# Altium PCB MainPCBV6.PcbDoc (part 4 of 5)
Units mm, origin at the board's own origin, x right, y up, seen from the top; angles counter-clockwise.
Board outline 176 x 144.01 mm, 2 copper layers (Top Layer, Bottom Layer); 232 components, 243 nets, 937 pads, 277 vias.
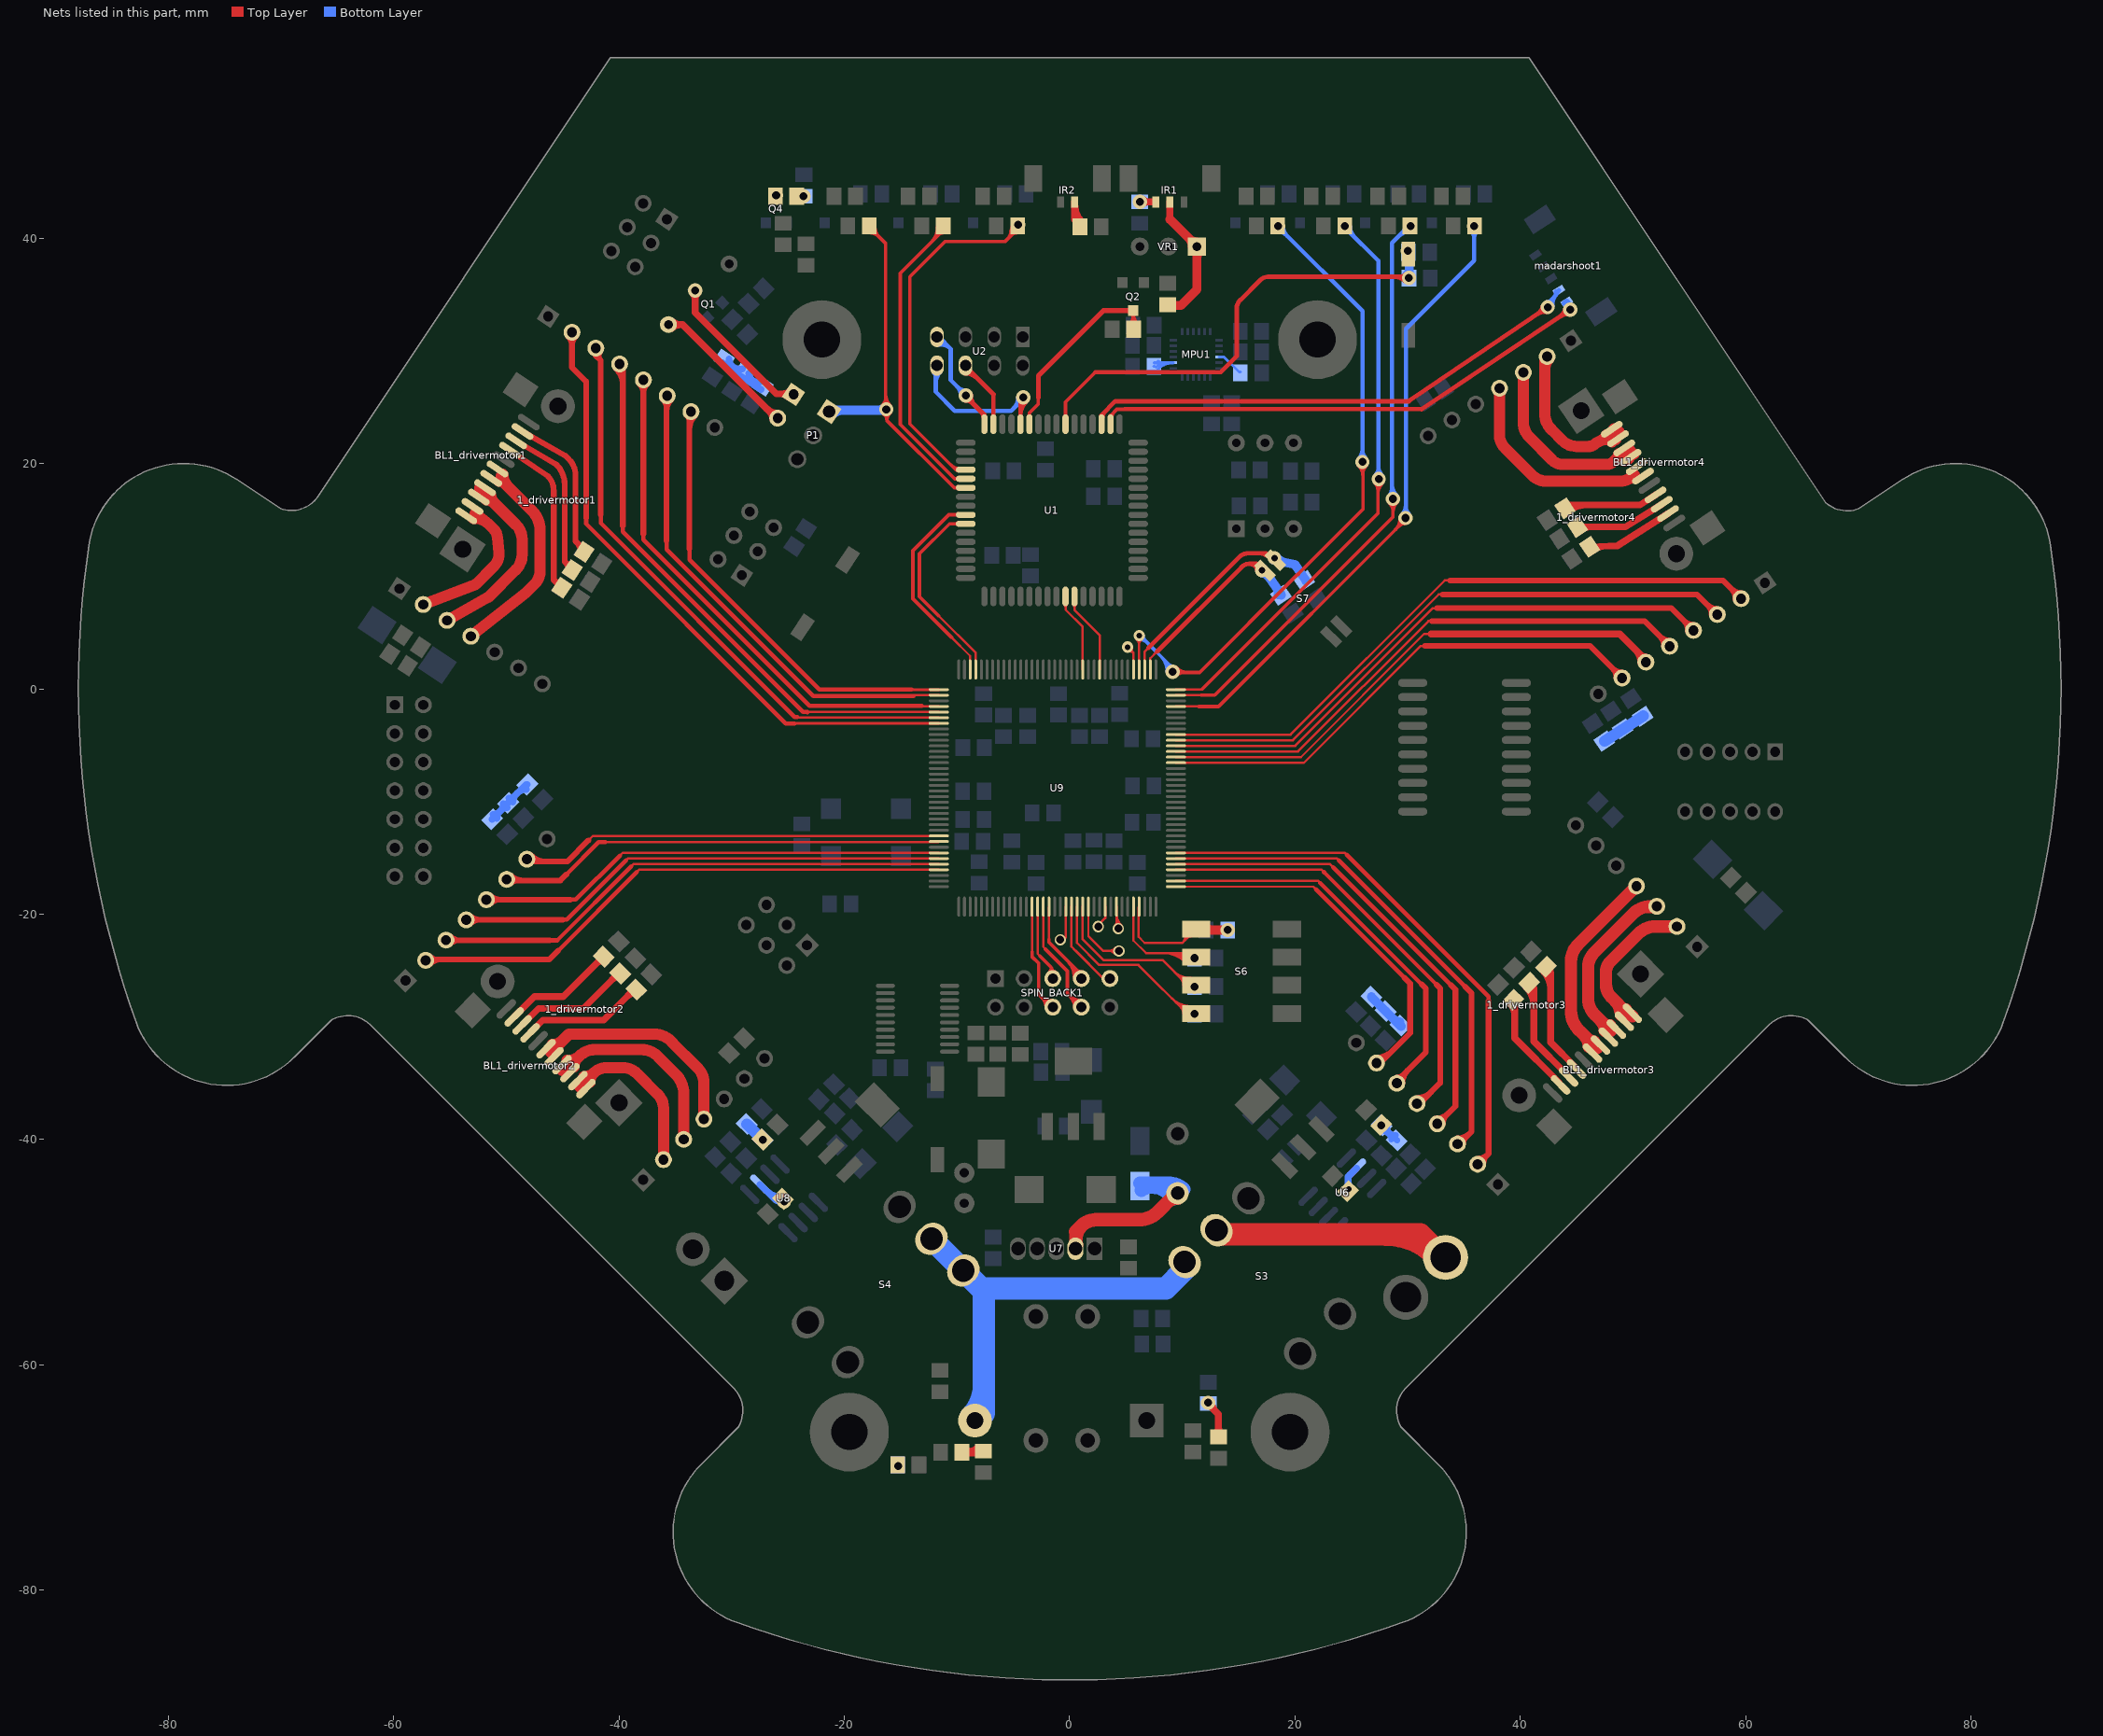
[diagram p4: the nets of this part, all layers, seen from the top]

## Via types
v1: diameter 1.27, hole 0.711, Top Layer to Bottom Layer, 228 vias
v2: diameter 1, hole 0.5, Top Layer to Bottom Layer, 16 vias
v3: diameter 2, hole 1, Top Layer to Bottom Layer, 11 vias
v4: diameter 0.8, hole 0.5, Top Layer to Bottom Layer, 5 vias
v5: diameter 1, hole 0.7, Top Layer to Bottom Layer, 5 vias
v6: diameter 1.2, hole 0.6, Top Layer to Bottom Layer, 3 vias
v7: diameter 1.778, hole 0.965, Top Layer to Bottom Layer, 2 vias
v8: diameter 1, hole 0.6, Top Layer to Bottom Layer, 2 vias
v9: diameter 0.9, hole 0.5, Top Layer to Bottom Layer, 1 vias
v10: diameter 0.7, hole 0.45, Top Layer to Bottom Layer, 1 vias
v11: diameter 1.2, hole 0.9, Top Layer to Bottom Layer, 1 vias
v12: diameter 0.8, hole 0.4, Top Layer to Bottom Layer, 1 vias
v13: diameter 1.1, hole 0.711, Top Layer to Bottom Layer, 1 vias

## Nets (pads, with @x,y where several pads share a name; then routed paths per layer and width w, separated by ;. In a path a pad name is that pad's centre, name@x,y a point inside that pad or via, vN(x,y) a via of type N, cw(c..) or ccw(c..) an arc to the next point about the centre after c; other vN are vias at no path point) (continued)
IO122: SPIN_BACK1.6 U9.122 | length 13.1
  Top Layer w0.203: U9.122@-3.342,-19.329 -3.342,-23.302 -3.327,-23.317
  Top Layer w0.305: -3.347,-23.339 -3.347,-23.78 -2.743,-24.384 -2.743,-27.127 -1.905,-27.965 SPIN_BACK1.6@-1.016,-27.965 ; -2.703,-27.167 ccw(c-1.506,-25.97) SPIN_BACK1.6@-1.506,-27.663 ; -2.453,-27.417 cw(c-3.296,-28.261) SPIN_BACK1.6@-2.104,-28.261 ; -2.183,-27.688 ccw(c-1.506,-27.011) SPIN_BACK1.6@-1.506,-27.968
IO123: SPIN_BACK1.5 U9.123 | length 8.1
  Top Layer w0.203: U9.123@-2.842,-19.339 -2.842,-23.523 -2.642,-23.724
  Top Layer w0.305: -2.642,-23.724 -1.626,-24.74 ; SPIN_BACK1.5@-1.874,-25.25 ccw(c-2.274,-24.74) -1.626,-24.74 ; SPIN_BACK1.5@-1.626,-25.781 -1.626,-24.74 ; SPIN_BACK1.5@-1.325,-25.151 cw(c-1.193,-24.74) -1.626,-24.74
IO124: SPIN_BACK1.8 U9.124 | length 13.8
  Top Layer w0.203: U9.124@-2.342,-19.355 -2.342,-22.905 -2.159,-23.089
  Top Layer w0.305: -2.159,-23.114 -0.203,-25.07 -0.203,-27.076 0.94,-28.219 SPIN_BACK1.8@1.6,-28.219 ; -0.076,-27.203 ccw(c1.034,-26.093) SPIN_BACK1.8@1.034,-27.663 ; 0.051,-27.331 cw(c-0.879,-28.261) SPIN_BACK1.8@0.436,-28.261 ; 0.444,-27.724 ccw(c1.034,-27.134) SPIN_BACK1.8@1.034,-27.968
IO125: SPIN_BACK1.7 U9.125 | length 11.4
  Top Layer w0.203: -1.842,-22.225 U9.125@-1.842,-19.406
  Top Layer w0.305: -1.842,-22.225 -1.842,-22.491 1.041,-25.375 1.041,-25.451 1.346,-25.756 SPIN_BACK1.7@1.6,-25.756 ; -0.236,-24.097 cw(c-1.86,-25.721) SPIN_BACK1.7@0.436,-25.721 ; 0.284,-24.617 cw(c-0.819,-25.721) SPIN_BACK1.7@0.741,-25.721 ; 0.617,-24.951 ccw(c1.034,-24.534) SPIN_BACK1.7@1.034,-25.123
IO128: U9.128 | length 3.5
  Top Layer w0.203: v5@-0.711,-22.428 -0.342,-22.059 U9.128@-0.342,-19.339 ; v5@-0.44,-22.276 cw(c-0.153,-22.276) -0.356,-22.073
  other v5: -0.838,-22.276
IO129: SPIN_BACK1.9 U9.129 | length 8.1
  Top Layer w0.203: U9.129@0.158,-19.339 0.158,-22.891 0.508,-23.241
  Top Layer w0.254: 0.508,-23.241 2.988,-25.721 SPIN_BACK1.9@3.574,-25.721
IO132: U9.132 | length 7.4
  Top Layer w0.203: U9.132@1.658,-19.339 1.658,-21.952 2.972,-23.266 v5(4.369,-23.266) ; v5@4.087,-23.548 ccw(c3.407,-24.228) 3.407,-23.266 ccw(c3.407,-22.305) v5@4.087,-22.985
IO135: U9.135 | length 2.1
  Top Layer w0.203: v5@2.406,-21.1 3.158,-20.348 U9.135@3.158,-19.339
  other v5: 2.54,-21.107
IO137: U9.137 | length 4.5
  Top Layer w0.203: v5@4.036,-21.003 ccw(c3.743,-20.71) 4.158,-20.71 ; v5@4.158,-21.514 U9.137@4.158,-19.339 ; 4.158,-20.427 ccw(c5.176,-20.427) v5@4.456,-21.147 ; U9.137@4.158,-19.937 ccw(c5.667,-19.937) v5@4.6,-21.003
  other v5: 4.318,-21.285
IR1: Q2.1 R30.2 U1.27 | length 21.7
  Top Layer w0.305: U1.27@-3.661,24.186 ccw(c-3.871,24.396) -3.575,24.396 ccw(c-3.279,24.396) U1.27@-3.488,24.186 ; U1.27@-3.575,23.5 -3.575,24.493 -2.794,25.274 -2.794,25.857 ; R30.2@5.323,32.38 ccw(c4.473,33.229) 5.674,33.229 ccw(c6.876,33.229) R30.2@6.026,32.38 ; Q2.1@5.428,33.338 cw(c4.834,32.744) 5.674,32.744 ; R30.2@5.674,31.826 5.674,33.457 Q2.1@5.791,33.573 ; 5.674,32.916 cw(c6.271,32.916) Q2.1@5.849,33.338
  Top Layer w0.432: -2.769,25.883 -2.769,27.813 2.992,33.573 Q2.1@5.791,33.573 ; Q2.1@5.473,33.408 ccw(c5.074,33.008) 5.074,33.573 ccw(c5.074,34.139) Q2.1@5.473,33.739
IRQ: U1.28 U2.8 | length 19.5
  Top Layer w0.381: U1.28@-4.375,23.5 -4.375,25.597 v1@-4.039,25.933 ; U1.28@-4.375,24.182 cw(c-2.414,24.182) v1@-3.8,25.568 ; -4.375,25.102 cw(c-3.334,25.102) v1@-4.07,25.838
  Bottom Layer w0.305: U2.8@-11.887,28.651 U2.8@-11.786,28.753
  Bottom Layer w0.381: U2.8@-12.075,28.112 cw(c-12.529,27.659) -11.887,27.659 ; -11.887,27.168 cw(c-10.552,27.168) U2.8@-11.496,28.112 ; U2.8@-11.887,28.651 -11.887,26.365 -10.211,24.689 -5.207,24.689 v1@-4.115,25.781 ; -4.945,24.95 ccw(c-5.878,25.883) v1@-4.559,25.883 ; -4.7,25.196 cw(c-4.115,24.61) v1@-4.115,25.438
  other v1: -4.115,25.883
K_TEST: C14.1 R22.1 S2.1 U1.23 | length 45.8
  Top Layer w0.305: U1.23@-0.461,24.186 ccw(c-0.671,24.396) -0.375,24.396 ccw(c-0.079,24.396) U1.23@-0.288,24.186 ; U1.23@-0.375,23.5 -0.375,25.457 2.286,28.118
  Top Layer w0.4: 2.286,28.118 13.411,28.118 14.828,29.534 14.828,33.782 cw(c15.856,33.782) 15.129,34.509 ; 15.129,34.509 16.904,36.284 cw(c17.609,35.579) 17.609,36.576 30.013,36.576 v1(30.114,36.474) ; 28.819,36.576 cw(c28.819,35.179) v1@29.807,36.167 ; 29.309,36.576 ccw(c29.309,37.279) v1@29.807,36.782
  Bottom Layer w0.635: C14.1@30.114,36.601 C14.1@30.14,36.627
  Bottom Layer w0.8: R22.1@29.857,38.721 cw(c29.173,38.038) R22.1@30.14,38.038 ; R22.1@29.887,38.484 cw(c29.276,37.873) 30.14,37.873 ; C14.1@29.937,36.751 ccw(c29.449,37.239) 30.14,37.239 ; C14.1@30.14,36.627 R22.1@30.14,38.532
  other v1: 30.023,38.887
KICK_CHIP: madarshoot1.1 U1.18 | length 49
  Top Layer w0.3: U1.18@3.625,24.254 4.187,24.816 4.877,24.816 ; U1.18@3.75,24.1 cw(c4.425,24.1) 3.948,24.577
  Top Layer w0.4: U1.18@3.625,23.5 U1.18@3.625,24.254 ; 4.902,24.841 31.241,24.841 ; 31.241,24.805 v1(44.435,33.665) ; v1@44.008,33.749 cw(c42.978,33.951) 43.563,33.079 cw(c44.149,32.207) v1@44.351,33.238
  Bottom Layer w0.6: madarshoot1.1@43.953,34.23 cw(c43.723,33.596) v1@44.334,33.881 ; v1@44.128,33.797 ccw(c43.519,34.06) madarshoot1.1@44.12,34.341 ; v1(44.435,33.665) madarshoot1.1@44.12,34.341 ; v1@44.531,33.986 cw(c44.721,34.621) madarshoot1.1@44.12,34.341
KICK_DIR: madarshoot1.2 U1.19 | length 49.5
  Top Layer w0.4: U1.19@2.825,23.5 2.825,24.303 4.049,25.527 30.115,25.527 ; U1.19@2.9,24.1 cw(c3.572,24.1) 3.097,24.574 ; 30.115,25.556 v1(42.432,33.889) ; v1@42.004,33.971 cw(c40.973,34.17) 41.562,33.301 cw(c42.15,32.431) v1@42.349,33.462
  Bottom Layer w0.4: v1@42.346,34.316 ccw(c42.14,35.345) 43.014,34.763 ccw(c43.888,34.18) v1@42.858,33.974 ; v1(42.432,33.889) madarshoot1.2@43.426,35.381 ; 43.087,34.872 ccw(c42.668,35.152) madarshoot1.2@43.162,35.25
LED1: P1.1 R33_LED1.1 U1.38 | length 39.5
  Top Layer w0.305: R33_LED1.1@-17.79,40.494 cw(c-17.79,39.318) -16.959,40.149 ; R33_LED1.1@-17.79,40.98 -16.332,39.522 v1@-16.332,24.841 ; R33_LED1.1@-17.293,40.991 ccw(c-16.065,40.991) -16.933,40.123 ; v1@-16.623,25.157 ccw(c-17.324,25.858) -16.332,25.858 ; v1@-16.547,24.413 cw(c-16.937,23.824) -16.231,23.824 cw(c-15.358,23.824) v1@-15.953,24.463 ; -16.332,26.104 ccw(c-14.994,26.104) v1@-15.94,25.157 ; v1@-16.231,24.714 -16.231,23.825 -10.255,17.85 U1.38@-9.225,17.85 ; U1.38@-9.911,17.763 ccw(c-10.121,17.554) -10.121,17.85 ccw(c-10.121,18.146) U1.38@-9.911,17.936
  Bottom Layer w0.8: P1.1@-21.336,24.74 -16.434,24.74 v1@-16.332,24.841 ; P1.1@-21.079,24.33 cw(c-20.089,23.34) -20.089,24.74 ; -17.033,24.74 ccw(c-17.033,25.567) v1@-16.448,24.982
  other v1: -16.281,24.816
LED2: R33_LED2.1 U1.37 | length 30.5
  Top Layer w0.305: -12.275,39.668 ccw(c-13.598,40.991) R33_LED2.1@-11.727,40.991 ; -11.754,40.189 ccw(c-12.557,40.991) R33_LED2.1@-11.422,40.991 ; -11.605,40.338 cw(c-11.229,39.962) R33_LED2.1@-11.229,40.494 ; R33_LED2.1@-11.43,40.538 R33_LED2.1@-11.43,40.919 ; R33_LED2.1@-11.049,40.894 -15.037,36.906 -15.037,23.47 -10.217,18.65 U1.37@-9.225,18.65 ; U1.37@-9.911,18.563 ccw(c-10.121,18.354) -10.121,18.65 ccw(c-10.121,18.946) U1.37@-9.911,18.736
LED3: R33_LED3.1 U1.36 | length 39.8
  Top Layer w0.305: -10.551,19.873 ccw(c-9.825,20.6) U1.36@-9.825,19.572 ; U1.36@-9.911,19.363 ccw(c-10.121,19.154) -10.121,19.45 ccw(c-10.121,19.746) U1.36@-9.911,19.536 ; U1.36@-9.225,19.45 -10.128,19.45 -14.199,23.52 -14.199,36.576 -11.049,39.726 -5.716,39.726 R33_LED3.1@-4.35,41.091 ; -5.629,39.813 ccw(c-7.015,41.199) R33_LED3.1@-5.055,41.199 ; -5.598,39.843 ccw(c-6.747,40.991) R33_LED3.1@-5.123,40.991 ; R33_LED3.1@-5.224,40.612 cw(c-4.188,40.334) R33_LED3.1@-4.624,41.315 ; -5.176,40.265 cw(c-4.625,39.715) R33_LED3.1@-4.625,40.494 ; -5.108,40.333 ccw(c-5.974,41.199) R33_LED3.1@-4.75,41.199 ; R33_LED3.1@-5.078,40.363 ccw(c-5.706,40.991) R33_LED3.1@-4.818,40.991 ; R33_LED3.1@-4.99,40.957 cw(c-5.455,40.689) R33_LED3.1@-4.936,40.55 ; R33_LED3.1@-4.834,40.608 cw(c-4.572,40.346) R33_LED3.1@-4.572,40.716 ; R33_LED3.1@-4.633,41.061 ccw(c-4.72,41.148) -4.625,41.07 ccw(c-4.72,41.148) -4.597,41.148 cw(c-4.53,41.215) -4.625,41.215 R33_LED3.1@-4.625,41.421
  other v1: -4.572,41.199
LED4: R33_LED4.1 U9.33 | length 62
  Top Layer w0.203: U9.33@9.433,-1.564 11.47,-1.564 11.481,-1.575
  Top Layer w0.305: 11.481,-1.575 13.208,-1.575 29.845,15.062 v1@29.845,15.265 ; 28.906,14.123 ccw(c27.865,15.164) v1@29.337,15.164 ; 29.213,14.43 cw(c29.82,13.823) v1@29.82,14.681 ; 29.426,14.643 ccw(c28.906,15.164) v1@29.642,15.164
  Bottom Layer w0.381: v1@29.505,15.478 ccw(c28.685,16.298) 29.845,16.298 ; v1@29.845,15.062 29.845,31.953 35.916,38.024 35.916,41.072 v1@35.814,41.173 ; 29.845,16.176 ccw(c30.831,16.176) v1@30.134,15.478 ; v1@35.576,40.757 cw(c34.756,39.937) 35.916,39.937 ; 35.916,40.06 cw(c36.902,40.06) v1@36.205,40.757
  other v1: 29.82,15.164 35.89,41.072
LED5: R33_LED5.1 U9.35 | length 57.7
  Top Layer w0.203: U9.35@9.433,-0.564 11.679,-0.564 11.684,-0.559
  Top Layer w0.305: 11.684,-0.559 12.878,-0.559 28.702,15.265 v1@28.702,16.713 ; v1@28.361,16.524 cw(c27.537,15.7) 28.702,15.7 cw(c29.867,15.7) v1@29.043,16.524
  Bottom Layer w0.381: v1@28.388,17.18 ccw(c27.874,17.693) 28.6,17.693 ; v1@28.473,16.713 v1@28.588,16.828 ; v1@28.6,16.815 28.6,39.573 v1@30.15,41.123 ; 28.6,18.184 ccw(c30.02,18.184) v1@29.016,17.18 ; v1@28.629,16.793 v1(28.702,16.866) ; 29.232,40.205 cw(c30.251,39.186) v1@30.251,40.627 ; 29.6,40.573 ccw(c29.102,41.072) v1@29.807,41.072
  other v1: 30.251,41.072
LED6: R33_LED6.1 U9.36 | length 56.4
  Top Layer w0.203: U9.36@9.433,-0.064 11.722,-0.064 11.77,-0.016
  Top Layer w0.305: 11.77,-0.016 27.356,15.57 v1@27.356,18.618 ; v1@27.091,18.277 cw(c26.451,17.637) 27.356,17.637 ; 27.356,17.269 cw(c28.781,17.269) v1@27.773,18.277
  Bottom Layer w0.381: v1@24.397,40.805 24.6,40.805 27.407,37.998 v1@27.407,18.44 ; v1@24.435,40.627 cw(c24.435,39.799) 25.02,40.385 ; v1@24.879,41.072 ccw(c26.198,41.072) 25.265,40.14 ; v1@27.118,18.933 ccw(c26.42,19.63) 27.407,19.63 ; 27.407,19.753 ccw(c28.566,19.753) v1@27.746,18.933
  other v1: 27.432,18.618 24.435,41.072
LED7: R33_LED7.1 U9.40 | length 71.4
  Top Layer w0.203: v2@5.922,4.414 cw(c5.523,3.921) 6.158,3.921 ; U9.40@6.158,1.711 6.158,2.969 6.156,2.97 6.156,3.919 6.158,3.921 ; v2@6.158,4.724 6.158,3.921 ; v2@6.404,4.401 ccw(c6.748,3.921) 6.158,3.921
  Top Layer w0.305: v1@9.144,1.448 11.532,1.448 20.27,10.186 ; v1@9.485,1.183 cw(c10.125,0.543) 10.125,1.448 ; v1@9.485,1.865 ccw(c10.493,2.873) 10.493,1.448 ; 20.271,10.186 26.035,15.95 v1@26.035,20.193 ; v1@25.643,19.801 cw(c24.696,18.854) 26.035,18.854 ; 26.035,19.1 cw(c27.027,19.1) v1@26.325,19.801
  Top Layer w0.381: 20.27,10.186 20.271,10.186
  Bottom Layer w0.203: v2@6.172,4.394 v2@6.172,4.801 ; v1@9.213,1.517 v1@9.213,1.76
  Bottom Layer w0.3: v2@6.172,4.374 cw(c6.172,3.345) 6.9,4.073 ; v2@6.172,4.801 v1@9.213,1.76 ; v2@6.522,4.724 ccw(c7.183,4.724) 6.716,4.257 ; 8.101,2.872 cw(c6.752,1.524) v1@8.659,1.524 ; 8.613,2.36 cw(c7.777,1.524) v1@8.959,1.524 ; 8.836,2.136 ccw(c9.144,2.444) v1@9.144,2.009
  Bottom Layer w0.381: v1@18.491,40.627 cw(c18.491,39.677) 19.163,40.349 ; v1@18.847,40.869 18.644,40.869 25.984,33.528 v1@25.984,20.091 ; v1@18.936,41.072 ccw(c20.131,41.072) 19.286,40.226 ; v1@25.67,20.457 ccw(c24.911,21.215) 25.984,21.215 ccw(c27.057,21.215) v1@26.299,20.457
  other v1: 9.144,1.524 25.984,20.142 18.491,41.072
  other v2: 6.172,4.724
M0: R45.1 S7.4 U9.38 | length 23.6
  Top Layer w0.203: U9.38@7.158,1.88 7.158,2.713 7.747,3.302 ; S7.4@16.634,10.759 ccw(c16.384,10.898) S7.4@16.586,11.1 ; S7.4@16.948,10.999 cw(c16.856,11.37) S7.4@16.586,11.1 ; S7.4@17.018,10.668 S7.4@16.586,11.1
  Top Layer w0.4: 7.747,3.302 15.257,10.812 cw(c15.951,10.119) 15.951,11.1 ; 16.004,11.1 cw(c16.004,10.022) S7.4@16.767,10.784 ; 16.243,11.087 cw(c15.802,10.324) v6@16.673,10.456 ; 16.405,11.1 cw(c16.405,10.431) S7.4@17.069,10.516 ; S7.4@16.443,10.971 ccw(c16.787,11.566) S7.4@16.965,10.902 ; S7.4@16.586,11.1 15.951,11.1 ; v6@16.672,10.465 ccw(c15.951,10.373) 15.951,11.1
  Bottom Layer w0.8: v6@17.034,10.319 cw(c16.854,9.298) 17.703,9.893 ; v6@17.144,10.69 18.792,8.337 R45.1@18.796,8.331 ; 18.378,8.929 cw(c17.746,8.486) R45.1@18.505,8.352
  other v6: 17.069,10.516
M1N1: 1_drivermotor1.3 U9.74 | length 45.1
  Top Layer w0.203: -13.868,-0.564 U9.74@-11.617,-0.564
  Top Layer w0.381: -35.789,13.132 -35.789,12.37 -22.766,-0.653 -13.868,-0.653
  Top Layer w0.508: 1_drivermotor1.3@-36.08,25.661 cw(c-36.783,24.959) -35.789,24.959 ; -35.789,13.132 -35.789,25.953 1_drivermotor1.3@-35.729,26.012 ; -35.789,24.671 cw(c-34.388,24.671) 1_drivermotor1.3@-35.378,25.661
M1N2: 1_drivermotor2.3 U9.100 | length 41.8
  Top Layer w0.203: -41.224,-13.614 -11.668,-13.614 U9.100@-11.617,-13.564 ; -12.56,-13.614 ccw(c-12.56,-13.385) U9.100@-12.398,-13.547
  Top Layer w0.381: -44.679,-16.485 -41.808,-13.614 -41.224,-13.614
  Top Layer w0.508: 1_drivermotor2.3@-49.855,-16.793 -49.63,-17.018 -45.212,-17.018 -44.679,-16.485 ; 1_drivermotor2.3@-49.631,-17.27 cw(c-49.023,-17.877) -49.023,-17.018 ; 1_drivermotor2.3@-49.631,-16.568 ccw(c-48.545,-15.482) -48.545,-17.018
M1N3: 1_drivermotor3.3 U9.2 | length 37.5
  Top Layer w0.203: U9.2@9.433,-17.064 22.068,-17.064 22.25,-17.247
  Top Layer w0.381: 22.25,-17.247 31.242,-26.238
  Top Layer w0.508: 1_drivermotor3.3@28.931,-34.95 31.598,-32.283 31.598,-26.594 31.242,-26.238 ; 1_drivermotor3.3@29.035,-34.525 ccw(c29.035,-33.748) 29.584,-34.297 ; 1_drivermotor3.3@29.531,-35.021 cw(c31.149,-35.021) 30.005,-33.876
M1N4: 1_drivermotor4.3 U9.24 | length 48.6
  Top Layer w0.203: U9.24@9.433,-6.064 20.53,-6.064 31.471,4.877 32.106,4.877
  Top Layer w0.635: 32.106,4.877 48.819,4.877 1_drivermotor4.3@50.94,2.756 ; 50.289,3.407 cw(c49.256,2.375) 1_drivermotor4.3@50.716,2.375 ; 50.705,2.991 ccw(c51.149,3.435) 1_drivermotor4.3@51.149,2.807
M1P1: 1_drivermotor1.2 U9.73 | length 41.8
  Top Layer w0.254: -14.029,-0.064 U9.73@-11.617,-0.064
  Top Layer w0.381: 1_drivermotor1.2@-33.909,24.31 1_drivermotor1.2@-33.757,24.157 ; -33.757,12.446 -33.757,11.455 -22.229,-0.072 -14.021,-0.072
  Top Layer w0.5: 1_drivermotor1.2@-33.969,24.25 cw(c-34.482,23.737) -33.757,23.737 ; -33.757,12.446 -33.757,24.157 1_drivermotor1.2@-33.757,24.21 ; -33.757,23.056 cw(c-32.068,23.056) 1_drivermotor1.2@-33.262,24.25
M1P2: 1_drivermotor2.2 U9.99 | length 38.9
  Top Layer w0.203: -42.723,-13.462 -42.325,-13.064 U9.99@-11.617,-13.064
  Top Layer w0.508: 1_drivermotor2.2@-48.006,-15.342 -44.602,-15.342 -42.723,-13.462 ; 1_drivermotor2.2@-47.835,-14.772 ccw(c-46.46,-13.397) -46.46,-15.342
M1P3: 1_drivermotor3.2 U9.1 | length 34.3
  Top Layer w0.203: U9.1@9.433,-17.564 21.628,-17.564 21.857,-17.793
  Top Layer w0.381: 21.857,-17.793 29.697,-25.633
  Top Layer w0.508: 1_drivermotor3.2@27.239,-32.729 ccw(c27.239,-30.762) 28.63,-32.153 ; 1_drivermotor3.2@27.254,-33.172 27.61,-33.172 30.226,-30.556 30.226,-26.162 29.697,-25.633
M1P4: 1_drivermotor4.2 U9.23 | length 47
  Top Layer w0.203: U9.23@9.433,-6.564 20.792,-6.564 31.166,3.81 31.521,3.81
  Top Layer w0.508: 31.521,3.81 46.203,3.81 1_drivermotor4.2@49.073,0.94 ; 48.18,1.832 cw(c47.314,0.966) 1_drivermotor4.2@48.539,0.966 ; 48.208,1.804 ccw(c49.035,2.631) 1_drivermotor4.2@49.035,1.462
M2: R46.1 S7.3 U9.39 | length 24.8
  Top Layer w0.203: U9.39@6.658,1.711 6.658,3.305 7.01,3.658 ; S7.3@17.529,11.847 ccw(c17.259,11.849) 17.45,12.04 ; S7.3@17.551,11.938 cw(c17.221,11.608) S7.3@17.688,11.608 ; S7.3@17.616,11.873 ccw(c17.83,12.087) S7.3@18.01,11.845 ; S7.3@17.889,12.008 cw(c17.688,12.278) 17.45,12.04 ; S7.3@18.199,11.29 17.45,12.04
  Top Layer w0.4: 7.01,3.658 15.062,11.709 cw(c15.859,10.912) 15.859,12.04 17.45,12.04 ; 16.874,12.04 cw(c16.874,10.892) S7.3@17.686,11.703 ; 17.255,11.952 ccw(c17.619,12.582) S7.3@17.985,11.953
  Bottom Layer w0.8: v6@18.136,11.405 19.989,11.045 20.922,9.663 R46.1@20.98,9.576 ; v6@18.352,11.72 ccw(c19.344,12.389) 19.116,11.214
  other v6: 18.186,11.608
M2N1: 1_drivermotor1.5 U9.77 | length 51.3
  Top Layer w0.203: -23.294,-2.064 U9.77@-11.617,-2.064
  Top Layer w0.381: -39.675,14.478 -39.675,13.945 -23.666,-2.064 -23.294,-2.064 -23.286,-2.072
  Top Layer w0.508: 1_drivermotor1.5@-40.307,28.479 cw(c-41.832,26.954) -39.675,26.954 ; 1_drivermotor1.5@-40.082,28.704 -39.675,28.297 -39.675,14.478
M2N2: 1_drivermotor2.5 U9.103 | length 46.1
  Top Layer w0.203: -39.383,-15.227 -39.219,-15.064 U9.103@-11.617,-15.064
  Top Layer w0.381: -45.009,-20.498 -44.653,-20.498 -39.383,-15.227
  Top Layer w0.508: 1_drivermotor2.5@-53.594,-20.498 -45.009,-20.498 ; 1_drivermotor2.5@-53.223,-20.862 cw(c-52.344,-21.74) -52.344,-20.498 ; 1_drivermotor2.5@-53.223,-20.16 ccw(c-52.408,-19.345) -52.408,-20.498
M2N3: 1_drivermotor3.5 U9.5 | length 43.9
  Top Layer w0.203: U9.5@9.433,-15.564 23.108,-15.564 23.381,-15.837
  Top Layer w0.381: 23.381,-15.837 33.871,-26.327
  Top Layer w0.508: 1_drivermotor3.5@32.627,-38.117 ccw(c32.627,-36.779) 33.573,-37.725 ; 1_drivermotor3.5@32.656,-38.642 34.239,-37.059 34.239,-26.695 33.871,-26.327 ; 1_drivermotor3.5@33.123,-38.613 cw(c34.18,-38.613) 33.432,-37.865
M2N4: 1_drivermotor4.5 U9.26 | length 53.7
  Top Layer w0.203: U9.26@9.433,-5.064 20.015,-5.064 32.242,7.163 32.614,7.163
  Top Layer w0.508: 32.614,7.163 53.416,7.163 1_drivermotor4.5@55.381,5.198 ; 54.521,6.058 cw(c53.656,5.192) 1_drivermotor4.5@54.88,5.192 ; 54.548,6.031 ccw(c55.376,6.859) 1_drivermotor4.5@55.376,5.688
M2P1: 1_drivermotor1.4 U9.76 | length 48.4
  Top Layer w0.203: -13.162,-1.564 U9.76@-11.617,-1.564
  Top Layer w0.381: -37.842,13.767 -37.842,13.23 -23.113,-1.5 -13.132,-1.5
  Top Layer w0.508: 1_drivermotor1.4@-38.193,27.07 cw(c-39.04,26.224) -37.842,26.224 cw(c-36.645,26.224) 1_drivermotor1.4@-37.492,27.07 ; -37.842,13.767 1_drivermotor1.4@-37.842,27.421
M2P2: 1_drivermotor2.4 U9.102 | length 43.5
  Top Layer w0.203: -39.929,-14.808 -39.684,-14.564 U9.102@-11.617,-14.564
  Top Layer w0.381: -44.323,-18.72 -43.84,-18.72 -39.929,-14.808
  Top Layer w0.508: 1_drivermotor2.4@-51.562,-18.72 -44.323,-18.72 ; 1_drivermotor2.4@-51.427,-19.066 cw(c-50.592,-19.901) -50.592,-18.72 ; 1_drivermotor2.4@-51.427,-18.364 ccw(c-50.568,-17.506) -50.568,-18.72
M2P3: 1_drivermotor3.4 U9.4 | length 41.1
  Top Layer w0.203: U9.4@9.433,-16.064 22.363,-16.064 22.581,-16.281
  Top Layer w0.381: 22.581,-16.281 32.563,-26.264
  Top Layer w0.508: 1_drivermotor3.4@30.831,-36.638 1_drivermotor3.4@30.831,-36.817 31.077,-36.817 32.893,-35.001 32.893,-26.594 32.563,-26.264 ; 1_drivermotor3.4@30.831,-36.321 ccw(c30.831,-34.528) 32.098,-35.796 ; 1_drivermotor3.4@31.327,-36.817 cw(c31.929,-36.817) 31.503,-36.391
M2P4: 1_drivermotor4.4 U9.25 | length 51.6
  Top Layer w0.203: U9.25@9.433,-5.564 20.268,-5.564 31.852,6.02 32.156,6.02
  Top Layer w0.508: 32.156,6.02 51.029,6.02 1_drivermotor4.4@53.365,3.683 ; 52.413,4.635 cw(c51.562,3.784) 1_drivermotor4.4@52.766,3.784 ; 52.42,4.628 ccw(c53.262,5.47) 1_drivermotor4.4@53.262,4.28
M3N1: 1_drivermotor1.7 U9.79 | length 58
  Top Layer w0.254: -24.42,-3.064 U9.79@-11.617,-3.064
  Top Layer w0.381: -42.926,15.189 -42.926,14.656 -25.198,-3.072 -24.42,-3.072
  Top Layer w0.508: 1_drivermotor1.7@-44.533,31.297 cw(c-45.38,30.451) -44.183,30.451 cw(c-42.985,30.451) 1_drivermotor1.7@-43.832,31.297 ; 1_drivermotor1.7@-44.183,31.648 -44.183,28.536 -42.926,27.28 -42.926,15.189
M3N2: 1_drivermotor2.7 U9.105 | length 50.8
  Top Layer w0.203: -38.437,-16.275 -38.226,-16.064 U9.105@-11.617,-16.064
  Top Layer w0.381: -45.409,-23.247 -38.437,-16.275
  Top Layer w0.508: 1_drivermotor2.7@-57.166,-24.103 -57.089,-24.027 -46.189,-24.027 -45.409,-23.247 ; 1_drivermotor2.7@-56.815,-24.454 cw(c-55.784,-25.484) -55.784,-24.027 ; 1_drivermotor2.7@-56.815,-23.752 ccw(c-56.152,-23.09) -56.152,-24.027
M3N3: 1_drivermotor3.7 U9.7 | length 50.3
  Top Layer w0.203: U9.7@9.433,-14.564 24.419,-14.564 24.587,-14.732
  Top Layer w0.381: 24.587,-14.732 37.186,-27.33 37.186,-27.737
  Top Layer w0.508: 1_drivermotor3.7@36.17,-42.291 37.186,-41.275 37.186,-27.737 ; 1_drivermotor3.7@36.219,-41.709 ccw(c36.219,-40.423) 37.128,-41.332 ; 1_drivermotor3.7@36.715,-42.205 cw(c37.824,-42.205) 37.04,-41.421
M3N4: 1_drivermotor4.7 U9.28 | length 58.4
  Top Layer w0.203: U9.28@9.433,-4.064 19.601,-4.064 33.291,9.627 33.757,9.627
  Top Layer w0.508: 33.757,9.627 57.986,9.627 1_drivermotor4.7@59.602,8.01 ; 1_drivermotor4.7@59.106,8.01 ccw(c57.909,8.01) 58.756,8.857 ccw(c59.602,9.704) 1_drivermotor4.7@59.602,8.506
M3P1: 1_drivermotor1.6 U9.78 | length 53.7
  Top Layer w0.203: -24.132,-2.564 U9.78@-11.617,-2.564
  Top Layer w0.381: -41.631,15.469 -41.631,14.707 -24.435,-2.489 -24.178,-2.489
  Top Layer w0.508: 1_drivermotor1.6@-42.069,30.239 -42.069,29.582 -41.631,29.144 ; 1_drivermotor1.6@-41.679,29.933 ccw(c-41.209,29.566) -41.631,29.144 ; -41.631,15.469 -41.631,29.144
M3P2: 1_drivermotor2.6 U9.104 | length 48.4
  Top Layer w0.203: -38.938,-15.773 -38.729,-15.564 U9.104@-11.617,-15.564
  Top Layer w0.381: -46.152,-22.327 -45.491,-22.327 -38.938,-15.773
  Top Layer w0.508: 1_drivermotor2.6@-55.321,-22.327 -46.152,-22.327 ; 1_drivermotor2.6@-55.019,-22.658 cw(c-54.219,-23.457) -54.219,-22.327 ; 1_drivermotor2.6@-55.019,-21.956 ccw(c-54.125,-21.062) -54.125,-22.327
M3P3: 1_drivermotor3.6 U9.6 | length 47.1
  Top Layer w0.203: U9.6@9.433,-15.064 23.725,-15.064 23.889,-15.227
  Top Layer w0.381: 23.889,-15.227 35.103,-26.441
  Top Layer w0.508: 1_drivermotor3.6@34.423,-40.409 34.572,-40.409 35.662,-39.319 35.662,-27 35.103,-26.441 ; 1_drivermotor3.6@34.423,-39.913 ccw(c34.423,-38.356) 35.524,-39.457 ; 1_drivermotor3.6@34.919,-40.409 cw(c35.756,-40.409) 35.164,-39.817
M3P4: 1_drivermotor4.6 U9.27 | length 56.2
  Top Layer w0.203: U9.27@9.433,-4.564 19.808,-4.564 32.754,8.382 33.122,8.382
  Top Layer w0.508: 33.122,8.382 55.677,8.382 1_drivermotor4.6@57.582,6.477 ; 56.588,7.47 ccw(c57.489,8.371) 1_drivermotor4.6@57.489,7.097 ; 56.665,7.394 cw(c55.872,6.601) 1_drivermotor4.6@56.993,6.601
MENU0: R50.1 S6.5 U9.141 | length 14.7
  Top Layer w0.203: 6.107,-20.281 cw(c6.336,-20.281) U9.141@6.174,-20.119 ; U9.141@6.158,-19.339 6.107,-19.389 6.107,-22.008 6.655,-22.555 10.008,-22.555 ; S6.5@10.162,-21.609 cw(c9.428,-21.975) 10.008,-22.555 ; 10.207,-22.356 ccw(c9.694,-21.842) S6.5@10.343,-21.519 ; 10.407,-22.156 ccw(c9.96,-21.71) S6.5@10.525,-21.428 ; 10.491,-22.072 cw(c10.742,-22.324) S6.5@10.742,-21.968 ; S6.5@10.897,-21.666 10.008,-22.555
  Top Layer w0.8: S6.5@11.493,-21.396 11.509,-21.412 v1(14.031,-21.412) ; S6.5@11.989,-21.072 ccw(c12.81,-20.252) 12.81,-21.412
MENU1: R49.1 S6.6 U9.140 | length 25.5
  Top Layer w0.203: U9.140@5.658,-19.339 5.658,-22.346 6.782,-23.47 S6.6@11.151,-23.47 ; 8.331,-23.47 cw(c8.331,-26.231) S6.6@10.283,-24.278 ; 8.759,-23.47 cw(c8.759,-26.232) S6.6@10.712,-24.279 ; 8.822,-23.47 cw(c8.822,-25.74) S6.6@10.427,-24.135 ; 9.25,-23.47 cw(c9.25,-25.741) S6.6@10.856,-24.135 ; 9.312,-23.47 cw(c9.312,-25.249) S6.6@10.571,-23.991 ; 9.741,-23.47 cw(c9.741,-25.25) S6.6@11,-23.991 ; 9.803,-23.47 cw(c9.803,-24.759) S6.6@10.714,-23.847 ; S6.6@10.022,-23.47 ccw(c10.022,-23.1) S6.6@10.283,-23.361 ; S6.6@10.063,-23.667 ccw(c10.313,-23.275) S6.6@10.674,-23.567 ; S6.6@10.231,-23.47 cw(c10.231,-24.76) S6.6@11.143,-23.848 ; S6.6@10.254,-23.789 ccw(c10.491,-23.419) S6.6@10.832,-23.694 ; S6.6@10.445,-23.911 ccw(c10.668,-23.562) S6.6@10.991,-23.822 ; S6.6@10.452,-23.696 ccw(c10.632,-23.383) S6.6@10.871,-23.654 ; S6.6@10.573,-24.036 ccw(c9.815,-24.233) 10.207,-23.554 ccw(c10.435,-23.159) S6.6@10.737,-23.501
  other v1: 11.09,-23.901
MENU2: R48.1 S6.7 U9.131 | length 33
  Top Layer w0.203: U9.131@1.158,-19.339 1.158,-22.24 2.997,-24.079 8.23,-24.079 10.465,-26.314 S6.7@11.227,-26.314 ; 9.171,-25.021 ccw(c10.742,-23.45) S6.7@10.742,-25.671 ; 9.329,-25.179 ccw(c11.09,-23.418) S6.7@11.09,-25.908 ; 9.518,-25.368 ccw(c10.742,-24.144) S6.7@10.742,-25.875 ; 9.676,-25.526 ccw(c11.09,-24.112) S6.7@11.09,-26.111 ; 9.827,-25.677 cw(c9.184,-26.32) S6.7@10.093,-26.32 ; 9.865,-25.715 ccw(c10.742,-24.838) S6.7@10.742,-26.078 ; 9.971,-25.668 cw(c9.566,-27.182) S6.7@10.975,-26.497 ; 9.976,-25.67 cw(c9.774,-26.425) S6.7@10.556,-26.435 ; S6.7@10.023,-25.873 ccw(c11.09,-24.806) S6.7@11.09,-26.314 ; S6.7@10.061,-25.895 cw(c9.789,-26.913) S6.7@10.779,-26.554 ; S6.7@10.229,-25.737 cw(c10.044,-26.428) S6.7@10.759,-26.437 ; S6.7@10.37,-26.219 ccw(c11.09,-25.5) S6.7@11.09,-26.518 ; S6.7@10.401,-25.783 cw(c10.095,-26.925) S6.7@11.158,-26.408 ; S6.7@10.438,-25.996 cw(c10.236,-26.751) S6.7@10.97,-26.485 ; S6.7@10.482,-25.805 cw(c10.314,-26.432) S6.7@10.963,-26.44 ; S6.7@10.522,-26.019 ccw(c10.625,-25.637) S6.7@10.823,-25.979 ; S6.7@10.734,-25.873 cw(c10.583,-26.435) S6.7@11.166,-26.442
  other v1: 11.09,-26.441
MENU3: R47.1 S6.8 U9.130 | length 33.2
  Top Layer w0.203: U9.130@0.658,-19.339 0.658,-22.553 2.616,-24.511 6.096,-24.511 10.606,-29.021 S6.8@11.368,-29.021 ; 9.06,-27.475 ccw(c10.742,-25.792) S6.8@10.742,-28.171 ; 9.062,-27.477 ccw(c11.1,-25.439) S6.8@11.1,-28.321 ; 9.407,-27.822 ccw(c10.742,-26.486) S6.8@10.742,-28.375 ; 9.409,-27.824 ccw(c11.1,-26.133) S6.8@11.1,-28.524 ; 9.753,-28.168 ccw(c10.742,-27.18) S6.8@10.742,-28.578 ; 9.756,-28.171 ccw(c11.1,-26.826) S6.8@11.1,-28.727 ; 9.873,-28.288 cw(c9.342,-28.82) S6.8@10.093,-28.82 ; S6.8@10.058,-28.209 cw(c9.716,-29.626) S6.8@10.989,-28.916 ; S6.8@10.103,-28.518 ccw(c11.1,-27.52) S6.8@11.1,-28.931 ; S6.8@10.151,-28.42 cw(c9.9,-29.357) S6.8@10.795,-28.982 ; S6.8@10.308,-28.462 ccw(c10.487,-27.793) S6.8@10.833,-28.392 ; S6.8@10.449,-28.864 ccw(c11.1,-28.214) S6.8@11.1,-29.134 ; S6.8@10.51,-28.319 cw(c10.268,-29.318) S6.8@11.166,-28.817 ; S6.8@10.551,-28.527 cw(c10.383,-29.155) S6.8@10.983,-28.903
  other v1: 11.1,-28.854
MISO: U1.32 U2.7 | length 15.9
  Top Layer w0.305: U1.32@-7.62,23.368 U1.32@-7.62,23.5
  Top Layer w0.381: U1.32@-7.575,23.5 U1.32@-7.575,24.339
  Top Layer w0.432: v1@-9.246,25.984 U1.32@-7.595,24.333 ; v1@-9.22,25.616 cw(c-9.22,24.788) -8.635,25.373 ; v1@-8.801,26.035 ccw(c-7.605,26.035) -8.451,25.189 ; -7.827,24.565 cw(c-8.293,24.1) U1.32@-7.634,24.1
  Bottom Layer w0.305: U2.7@-11.963,31.471 U2.7@-11.836,31.471 ; v1(-9.22,26.035) v1@-9.195,26.035 ; v1@-9.144,25.984 v1@-9.195,26.035 ; v1@-9.144,26.035 v1@-9.195,26.035
  Bottom Layer w0.381: U2.7@-11.836,31.471 -10.566,30.201 ; U2.7@-11.78,30.914 cw(c-11.621,30.145) -11.066,30.7 ; U2.7@-11.703,30.541 cw(c-11.45,29.317) -10.566,30.201 ; -9.997,26.837 cw(c-10.799,26.035) v1@-9.665,26.035 ; -9.936,26.776 ccw(c-9.22,27.491) v1@-9.22,26.479 ; v1@-9.195,26.035 -10.566,27.407 -10.566,30.201
MISO_CUR1: U1.42 U9.69 | length 18
  Top Layer w0.203: -11.646,6.49 -8.342,3.186 U9.69@-8.342,1.711
  Top Layer w0.305: -11.646,6.49 -13.335,8.179 -13.335,11.989 -10.674,14.65 U1.42@-9.225,14.65 ; U1.42@-9.911,14.563 ccw(c-10.121,14.354) -10.121,14.65 ccw(c-10.121,14.946) U1.42@-9.911,14.736
MOSI: U1.31 U2.6 | length 7.4
  Top Layer w0.381: U1.31@-6.775,23.5 -6.775,26.155
  Top Layer w0.4: U2.6@-9.246,28.702 U2.6@-9.233,28.689
  Top Layer w0.432: U2.6@-9.271,28.651 -6.775,26.155 ; U2.6@-9.246,28.018 cw(c-9.246,26.55) -8.208,27.588
MOSI_CUR1: U1.41 U9.70 | length 19.1
  Top Layer w0.203: -10.486,4.568 -8.842,2.924 U9.70@-8.842,1.711
  Top Layer w0.305: -10.486,4.568 -13.919,8.001 -13.919,12.268 -10.738,15.45 U1.41@-9.225,15.45 ; U1.41@-9.911,15.363 ccw(c-10.121,15.154) -10.121,15.45 ccw(c-10.121,15.746) U1.41@-9.911,15.536
MOTOR_NUM0: U1.58 U9.50 | length 7.8
  Top Layer w0.203: U1.58@-0.497,7.477 cw(c-0.817,7.158) -0.365,7.158 ; U1.58@-0.375,8.2 -0.365,8.19 -0.365,7.02 1.158,5.497 U9.50@1.158,1.711 ; -0.365,7.204 cw(c0.021,7.204) U1.58@-0.252,7.477
MOTOR_NUM1: U1.59 U9.47 | length 8.1
  Top Layer w0.203: U1.59@0.303,7.477 cw(c0.007,7.181) 0.425,7.181 cw(c0.844,7.181) U1.59@0.548,7.477 ; U1.59@0.425,8.2 0.425,6.992 2.658,4.759 U9.47@2.658,1.711
MW1_DriverMotor1: 1_drivermotor1.14 BL1_drivermotor1.1 BL1_drivermotor1.2 | length 14.5
  Top Layer w1: 1_drivermotor1.14@-57.391,7.485 -52.725,9.266 -51.125,10.866 ccw(c-52.218,11.959) -51.124,10.867 ccw(c-52.218,11.959) -50.672,11.959 -50.672,12.119 -50.81,13.441 ccw(c-51.805,13.441) -51.102,14.144 -51.593,14.635 -52.769,15.561 -52.731,15.24 ; BL1_drivermotor1.1@-52.925,15.115 cw(c-52.744,13.599) -51.801,14.799 ; -52.76,15.548 ccw(c-52.746,15.55) -52.755,15.539
MW1_DriverMotor2: 1_drivermotor2.14 BL1_drivermotor2.1 BL1_drivermotor2.2 | length 16.2
  Top Layer w1: -43.485,-35.331 -42.268,-34.115 ; BL1_drivermotor2.2@-43.109,-34.417 ccw(c-43.01,-33.372) -42.268,-34.115 ; BL1_drivermotor2.1@-42.583,-34.936 cw(c-41.504,-34.879) -42.268,-34.115 ; -42.267,-34.114 cw(c-41.097,-35.285) -41.097,-33.63 -39.7,-33.63 cw(c-39.7,-35.469) -38.399,-34.168 -36.551,-36.017 cw(c-37.73,-37.197) -36.062,-37.197 1_drivermotor2.14@-36.062,-41.794
MW1_DriverMotor3: 1_drivermotor3.14 BL1_drivermotor3.1 BL1_drivermotor3.2 | length 14.6
  Top Layer w1.1: 48.069,-27.368 cw(c49.2,-26.238) 47.601,-26.238 47.601,-25.148 cw(c48.897,-25.148) 47.981,-24.232 50.486,-21.726 ; 48.069,-27.368 49.505,-28.804 ; 48.41,-27.709 cw(c47.177,-28.943) BL1_drivermotor3.2@48.921,-28.943 ; 49.051,-28.35 ccw(c49.378,-28.023) BL1_drivermotor3.1@49.378,-28.486 ; 49.617,-28.916 ccw(c49.944,-28.589) BL1_drivermotor3.1@49.944,-29.051 ; 50.487,-21.725 cw(c51.994,-23.233) 51.994,-21.101 1_drivermotor3.14@53.91,-21.101
MW1_DriverMotor4: 1_drivermotor4.14 BL1_drivermotor4.1 BL1_drivermotor4.2 | length 18.2
  Top Layer w1: 42.164,28.376 cw(c43.499,28.376) 1_drivermotor4.14@42.555,29.32 ; 1_drivermotor4.14@42.378,29.497 42.164,29.283 42.164,24.484 ccw(c44.245,24.484) 42.773,23.013 ; 42.774,23.012 43.751,22.035 ccw(c45.009,23.292) 45.009,21.514 45.996,21.514 ccw(c45.996,22.589) 46.148,21.525 ccw(c45.996,22.589) 46.756,21.829 48.335,22.618 48.412,22.657 ; 47.168,22.035 cw(c47.568,21.235) BL1_drivermotor4.2@48.139,21.924 ; 47.241,22.071 ccw(c46.879,22.794) BL1_drivermotor4.1@47.646,22.538 ; BL1_drivermotor4.2@48.49,22.142 cw(c49.004,22.338) 48.758,22.83 ; 48.015,22.458 ccw(c47.76,22.968) 48.318,23.087 cw(c47.76,22.968) 48.015,22.458
MW2_DriverMotor1: 1_drivermotor1.13 BL1_drivermotor1.3 BL1_drivermotor1.4 | length 19.2
  Top Layer w1: 1_drivermotor1.13@-55.278,6.076 -51.613,8.128 -49.154,10.586 ccw(c-50.455,11.887) -48.616,11.887 -48.616,13.284 ccw(c-50.394,13.284) -49.136,14.541 -51.994,17.399 ; BL1_drivermotor1.4@-52.355,17.851 ccw(c-52.255,17.812) -52.331,17.736 ; BL1_drivermotor1.4@-51.477,17.223 ccw(c-50.704,17.203) -51.251,16.656 ; BL1_drivermotor1.4@-51.426,17.23 ccw(c-50.063,17.412) -51.035,16.44 ; BL1_drivermotor1.3@-51.792,16.78 cw(c-51.792,15.772) -51.08,16.485 ccw(c-51.792,15.772) BL1_drivermotor1.3@-51.792,16.78
MW2_DriverMotor2: 1_drivermotor2.13 BL1_drivermotor2.3 BL1_drivermotor2.4 | length 20.9
  Top Layer w1: BL1_drivermotor2.4@-45.148,-33.817 ccw(c-44.95,-33.505) -44.688,-33.766 ; BL1_drivermotor2.4@-44.612,-32.973 ccw(c-44.264,-32.426) -43.806,-32.884 ccw(c-43.305,-33.385) BL1_drivermotor2.3@-43.991,-33.561 ; BL1_drivermotor2.4@-44.509,-33.004 ccw(c-44.479,-31.67) -43.536,-32.614 ; -44.425,-33.503 -43.536,-32.614 ; BL1_drivermotor2.3@-43.997,-33.511 cw(c-42.946,-33.511) -43.689,-32.767 ; -36.55,-32.64 -36.449,-32.741 ; 1_drivermotor2.13@-34.266,-39.998 -34.266,-35.963 ccw(c-36.776,-35.963) -35.001,-34.188 -36.55,-32.639 ccw(c-38.024,-34.114) -38.024,-32.029 -42.125,-32.029 ccw(c-42.125,-34.024) -43.535,-32.613
MW2_DriverMotor3: 1_drivermotor3.13 BL1_drivermotor3.3 BL1_drivermotor3.4 | length 17.3
  Top Layer w1: 46.025,-24.74 cw(c47.926,-24.74) 46.025,-24.714 46.025,-24.74
  Top Layer w1.1: 46.025,-24.74 46.025,-27.484 ccw(c48.106,-27.484) 46.634,-28.955 ; 46.025,-24.714 cw(c47.926,-24.74) 46.582,-23.395 50.254,-19.723 ; 46.634,-28.956 48.031,-30.353 ; 47.133,-29.455 cw(c46.231,-30.357) BL1_drivermotor3.4@47.507,-30.357 ; 47.305,-29.627 ccw(c47.964,-28.968) BL1_drivermotor3.3@47.964,-29.9 ; 50.025,-19.952 cw(c51.586,-21.512) 1_drivermotor3.13@51.586,-19.305 ; 51.293,-19.384 cw(c51.539,-20.301) 1_drivermotor3.13@52.014,-19.479
MW2_DriverMotor4: 1_drivermotor4.13 BL1_drivermotor4.3 BL1_drivermotor4.4 | length 19.2
  Top Layer w1: 1_drivermotor4.13@40.265,28.088 40.265,23.662 ccw(c42.153,23.662) 40.818,22.327 42.842,20.302 ccw(c43.78,21.24) 43.78,19.914 47.599,19.914 ccw(c47.599,20.984) 47.993,19.989 ccw(c47.599,20.984) 48.357,20.227 49.497,20.976 49.503,20.98 49.581,21.031 ; 48.266,20.168 ccw(c47.634,21.131) BL1_drivermotor4.3@48.762,20.897 ; 48.545,20.351 cw(c48.845,19.894) BL1_drivermotor4.4@49.279,20.227 ; 49.446,20.942 cw(c49.702,20.552) BL1_drivermotor4.4@50.072,20.837 ; BL1_drivermotor4.4@49.619,20.44 cw(c50.051,20.722) 49.767,21.154
MW3_DriverMotor1: 1_drivermotor1.12 BL1_drivermotor1.5 BL1_drivermotor1.6 | length 20.2
  Top Layer w1: 1_drivermotor1.12@-53.165,4.667 -48.277,8.529 -47.51,9.295 ccw(c-48.706,10.49) -47.015,10.49 -47.015,14.072 ccw(c-49.468,14.072) -47.734,15.806 -50.47,18.542 -50.47,18.898 ; BL1_drivermotor1.5@-50.683,18.444 cw(c-50.683,17.694) -50.152,18.224 ; BL1_drivermotor1.6@-50.328,19.076 ccw(c-48.697,19.076) -49.85,17.923
MW3_DriverMotor2: 1_drivermotor2.12 BL1_drivermotor2.5 BL1_drivermotor2.6 | length 21.8
  Top Layer w1: -46.076,-32.283 -44.45,-30.658 -36.906,-30.658 cw(c-36.906,-32.804) -35.389,-31.286 -33.033,-33.642 cw(c-34.392,-35.001) -32.47,-35.001 1_drivermotor2.12@-32.47,-38.202 ; BL1_drivermotor2.6@-45.925,-31.59 ccw(c-45.888,-30.371) -45.025,-31.233 ; BL1_drivermotor2.6@-45.919,-31.59 ccw(c-45.919,-30.294) -45.002,-31.21 ; -35.389,-31.286 -35.268,-31.407
MW3_DriverMotor3: 1_drivermotor3.12 BL1_drivermotor3.5 BL1_drivermotor3.6 | length 19.3
  Top Layer w1.1: 45.114,-22.713 ccw(c46.598,-24.195) 44.501,-24.195 44.501,-28.564 ccw(c47.041,-28.564) 45.245,-30.36 46.787,-31.902 ; 45.115,-22.712 1_drivermotor3.12@50.318,-17.509 ; 45.695,-30.81 cw(c44.734,-31.771) BL1_drivermotor3.6@46.093,-31.771 ; 45.95,-31.066 ccw(c46.55,-30.466) BL1_drivermotor3.5@46.55,-31.314
MW3_DriverMotor4: 1_drivermotor4.12 BL1_drivermotor4.5 BL1_drivermotor4.6 | length 18.2
  Top Layer w1: 1_drivermotor4.12@38.151,26.679 38.151,22.515 ccw(c39.711,22.515) 38.608,21.412 41.077,18.943 ccw(c42.291,20.157) 42.291,18.44 48.846,18.44 ccw(c48.846,20.249) 49.479,18.555 ccw(c48.846,20.249) 50.126,18.97
NC: U9.41 | length 3.2
  Top Layer w0.203: v2(5.131,3.708) 5.658,3.181 ; v2@5.209,3.318 cw(c5.306,2.829) 5.658,3.181 ; v2@5.522,3.631 ccw(c6.01,3.533) 5.658,3.181 ; U9.41@5.658,1.711 5.658,3.181
NetBattery1_1: Battery1.1 S3.2 | length 26.1
  Top Layer w2: S3.2@13.096,-48.438 31.115,-48.438 Battery1.1@33.376,-50.698 ; 28.092,-48.461 cw(c28.092,-54.688) Battery1.1@32.495,-50.285
NetBL1_drivermotor1_8: BL1_drivermotor1.8 R25_drivermotor1.2 | length 15.6
  Top Layer w0.508: BL1_drivermotor1.8@-49.685,21.184 -46.33,18.883 -46.324,18.877 cw(c-47.599,17.602) -45.796,17.602 -45.796,9.652 ; -45.599,9.455 cw(c-46,9.054) R25_drivermotor1.2@-45.433,9.054 ; R25_drivermotor1.2@-45.448,8.793 -45.448,9.304 -45.796,9.652 ; R25_drivermotor1.2@-45.113,9.443 cw(c-45.258,10.19) -45.796,9.652
NetBL1_drivermotor1_9: BL1_drivermotor1.9 R24_drivermotor1.2 | length 14.8
  Top Layer w0.508: BL1_drivermotor1.9@-48.563,21.668 -45.568,19.914 cw(c-47.348,18.134) -44.831,18.134 -44.831,11.278 ; -44.713,11.16 cw(c-45.244,10.629) R24_drivermotor1.2@-44.493,10.629 ; R24_drivermotor1.2@-44.255,10.419 -44.255,10.701 -44.831,11.278 ; R24_drivermotor1.2@-44.132,11.024 cw(c-44.21,11.899) -44.831,11.278
NetBL1_drivermotor1_10: BL1_drivermotor1.10 R23_drivermotor1.2 | length 15
  Top Layer w0.508: BL1_drivermotor1.10@-48.575,22.848 -44.782,20.71 -44.463,20.391 cw(c-45.906,18.948) -43.866,18.948 -43.866,13.106 -43.111,12.352 R23_drivermotor1.2@-43.111,12.146 ; -43.78,13.02 cw(c-44.57,12.229) R23_drivermotor1.2@-43.452,12.229 ; -43.617,12.858 ccw(c-43.056,13.419) R23_drivermotor1.2@-43.056,12.625
NetBL1_drivermotor2_8: BL1_drivermotor2.8 R25_drivermotor2.2 | length 12.2
  Top Layer w0.6: BL1_drivermotor2.8@-47.899,-30.541 -46.771,-29.413 -41.377,-29.413 R25_drivermotor2.2@-38.608,-26.645 ; -39.21,-27.247 cw(c-38.55,-27.907) R25_drivermotor2.2@-38.55,-26.974 ; -39.122,-27.159 ccw(c-39.657,-26.624) R25_drivermotor2.2@-38.9,-26.624
NetBL1_drivermotor2_9: BL1_drivermotor2.9 R24_drivermotor2.2 | length 11.8
  Top Layer w0.6: BL1_drivermotor2.9@-48.606,-29.834 -47.143,-28.372 -43.18,-28.372 R24_drivermotor2.2@-40.03,-25.222 ; -40.62,-25.812 cw(c-39.971,-26.461) R24_drivermotor2.2@-39.971,-25.543 ; -40.547,-25.739 ccw(c-41.093,-25.193) R24_drivermotor2.2@-40.321,-25.193
NetBL1_drivermotor2_10: BL1_drivermotor2.10 R23_drivermotor2.2 | length 11.6
  Top Layer w0.6: BL1_drivermotor2.10@-49.313,-29.127 -47.516,-27.33 -44.958,-27.33 R23_drivermotor2.2@-41.3,-23.673 ; -42.036,-24.409 cw(c-41.36,-25.085) R23_drivermotor2.2@-41.36,-24.129 ; -41.925,-24.297 ccw(c-42.443,-23.779) R23_drivermotor2.2@-41.71,-23.779
NetBL1_drivermotor3_8: BL1_drivermotor3.8 R25_drivermotor3.2 | length 13.5
  Top Layer w0.6: R25_drivermotor3.2@41.972,-24.989 cw(c40.219,-26.741) 42.697,-26.741 ; R25_drivermotor3.2@42.24,-24.74 42.697,-25.197 ; R25_drivermotor3.2@42.298,-25.082 cw(c42.394,-25.5) 42.697,-25.197 ; R25_drivermotor3.2@42.396,-24.564 cw(c41.668,-25.292) 42.697,-25.292 ; R25_drivermotor3.2@42.565,-24.794 ccw(c43.03,-24.864) 42.697,-25.197 ; BL1_drivermotor3.8@44.867,-33.548 42.697,-31.378 42.697,-25.197
NetBL1_drivermotor3_9: BL1_drivermotor3.9 R24_drivermotor3.2 | length 12.2
  Top Layer w0.6: R24_drivermotor3.2@40.468,-26.423 cw(c38.704,-28.187) 41.199,-28.187 ; R24_drivermotor3.2@40.869,-26.238 41.199,-26.568 41.199,-31.293 BL1_drivermotor3.9@44.16,-34.255 ; R24_drivermotor3.2@40.892,-25.999 cw(c40.153,-26.738) 41.199,-26.738
NetBL1_drivermotor3_10: BL1_drivermotor3.10 R23_drivermotor3.2 | length 10.2
  Top Layer w0.6: R23_drivermotor3.2@39.054,-27.929 cw(c37.983,-29) 39.497,-29 ; R23_drivermotor3.2@39.497,-27.61 39.497,-31.006 BL1_drivermotor3.10@43.453,-34.962
NetBL1_drivermotor4_8: BL1_drivermotor4.8 R25_drivermotor4.2 | length 10.1
  Top Layer w0.6: R25_drivermotor4.2@43.975,16.033 44.264,16.322 50.62,16.322 BL1_drivermotor4.8@52.005,17.221 ; R25_drivermotor4.2@44.278,15.702 cw(c45.774,14.205) 45.774,16.322
NetBL1_drivermotor4_9: BL1_drivermotor4.9 R24_drivermotor4.2 | length 9
  Top Layer w0.6: R24_drivermotor4.2@45.063,14.37 49.327,14.376 BL1_drivermotor4.9@52.56,16.389 ; R24_drivermotor4.2@45.366,14.04 cw(c46.166,13.242) 46.164,14.372
NetBL1_drivermotor4_10: BL1_drivermotor4.10 R23_drivermotor4.2 | length 8.7
  Top Layer w0.6: R23_drivermotor4.2@46.16,12.604 48.616,12.7 BL1_drivermotor4.10@53.114,15.557 ; R23_drivermotor4.2@46.472,12.283 cw(c47.306,11.511) 47.262,12.647
NetC1_2: C1.2 R1.2 R2.1 | length 12.8
  Bottom Layer w0.6: C1.2@-30.842,28.959 -29.089,27.689 R1.2@-27.413,26.571 ; C1.2@-30.562,28.756 ccw(c-29.37,30.4) R2.1@-29.05,28.395 ; C1.2@-30.235,29.264 ccw(c-28.204,29.588) R2.1@-29.411,27.922 ; C1.2@-30.136,28.815 ccw(c-29.226,29.553) R2.1@-29.048,28.395 ; R2.1@-28.924,27.579 ccw(c-27.789,29.283) R1.2@-27.387,27.275 ; R2.1@-28.485,28.007 ccw(c-26.477,28.409) R1.2@-27.613,26.705 ; R2.1@-28.345,27.537 ccw(c-27.669,28.131) R1.2@-27.417,27.268
NetC2_2: C2.2 R3.2 R4.1 | length 4.3
  Bottom Layer w0.8: R3.2@26.783,-27.344 R4.1@28.053,-28.614 29.385,-29.947 C2.2@29.439,-29.947 ; 28.79,-29.351 ccw(c29.303,-28.838) C2.2@29.303,-29.564
NetC3_2: C3.2 R5.2 R6.1 | length 2.2
  Bottom Layer w1: C3.2@-28.663,-38.645 -27.127,-40.18 R5.2@-27.127,-40.183
  other v1: -27.254,-40.056
NetC4_2: C4.2 R7.2 R8.1 | length 9.4
  Bottom Layer w0.6: C4.2@-51.269,-11.571 -49.835,-10.137 -49.835,-10.058 -48.26,-8.484 R7.2@-48.133,-8.484 ; C4.2@-51.198,-11.15 ccw(c-51.198,-10.305) -50.6,-10.903 ccw(c-50.003,-11.5) C4.2@-50.848,-11.5 ; -50.532,-10.835 ccw(c-51.173,-10.194) R8.1@-50.267,-10.194 ; -50.471,-10.773 cw(c-49.917,-11.328) R8.1@-49.917,-10.544 ; R8.1@-49.775,-9.703 ccw(c-49.775,-8.987) -49.269,-9.493 ; R8.1@-49.425,-10.053 cw(c-48.451,-10.053) -49.14,-9.364 ; -49.034,-9.258 cw(c-48.215,-10.076) R7.2@-48.215,-8.918
NetC5_2: C5.2 R9.2 R10.1 | length 4.1
  Bottom Layer w1: R9.2@47.466,-4.651 49.11,-3.588 50.874,-2.447 C5.2@50.927,-2.413
NetC6_2: C6.2 R11.1 R12.2 | length 7.7
  Bottom Layer w0.508: R12.2@27.574,-39.131 cw(c27.216,-40.673) R11.1@28.586,-39.882 ; R12.2@27.661,-39.141 cw(c27.661,-40.177) 28.393,-39.445 ; R12.2@27.697,-38.749 29.03,-40.081 R11.1@29.083,-40.081 ; R12.2@27.768,-39.216 cw(c27.768,-40.172) 28.444,-39.496 cw(c29.12,-38.82) R12.2@28.164,-38.82 ; R12.2@28.042,-38.76 ccw(c28.845,-38.76) 28.277,-39.329 ; 28.253,-39.305 cw(c27.534,-40.025) R11.1@28.551,-40.025 ; 28.315,-39.366 ccw(c28.947,-38.734) R11.1@28.947,-39.629
  other v1: 27.661,-38.76
NetC27_1: C27.1 U6.6 | length 3.8
  Bottom Layer w0.6: 24.714,-43.732 ccw(c25.457,-43.732) v2@24.932,-44.258 ; 24.714,-43.556 cw(c25.326,-43.556) U6.6@24.893,-43.124 ; v2(24.79,-44.399) 24.816,-44.425 24.816,-44.545 24.714,-44.647 24.714,-43.303 U6.6@25.459,-42.558
NetC35_1: C35.1 U8.6 | length 5
  Bottom Layer w0.6: U8.6@-27.505,-43.99 -26.079,-45.415 ; U8.6@-26.994,-44.501 ccw(c-25.349,-42.856) v1@-25.349,-45.182 ; v1@-25.644,-45.675 ccw(c-26.079,-45.909) -26.079,-45.415 ; v1@-25.451,-45.415 -26.079,-45.415
  other v1: -25.349,-45.517
NetC41_2: C41.2 MPU1.20 | length 4.8
  Bottom Layer w0.254: C41.2@7.47,28.635 C41.2@7.554,28.635 ; C41.2@7.518,28.943 MPU1.20@9.21,28.943 ccw(c9.21,27.029) C41.2@7.843,28.368 ; C41.2@7.662,28.546 cw(c8.605,27.622) 8.605,28.943 ; C41.2@7.84,29.104 ccw(c8.23,29.495) 8.23,28.943
NetC42_2: C42.2 MPU1.10 | length 2.4
  Bottom Layer w0.254: MPU1.10@13.26,29.443 13.72,29.443 15.033,28.13 C42.2@15.161,28.13
NetD2_1: D2.1 R35.1 | length 5.4
  Top Layer w0.635: v1@12.294,-63.5 13.208,-64.414 D2.1@13.208,-66.411 ; v1@12.611,-63.383 ccw(c13.66,-63.383) 12.918,-64.125 ; D2.1@12.973,-66.176 ccw(c12.405,-65.608) 13.208,-65.608 ccw(c14.011,-65.608) D2.1@13.443,-66.176
  other v1: 12.294,-63.383
NetD5_1: D5.1 R36.1
  other v1: -15.24,-68.986
NetD6_2: D6.2 L1.1 U7.2 | length 24.4
  Top Layer w1: U7.2@0.506,-49.708 0.506,-48.211
  Top Layer w1.2: 0.506,-48.211 1.054,-47.663 ; U7.2@0.603,-49.381 cw(c2.3,-48.909) 1.054,-47.663 ; L1.1@8.95,-45.381 ccw(c8.221,-44.652) L1.1@9.252,-44.652 ; L1.1@9.576,-45.236 9.019,-45.236 7.925,-46.33 7.794,-46.46 cw(c6.147,-44.812) 6.147,-47.142 2.311,-47.142 ccw(c2.311,-48.92) 1.054,-47.663
  Bottom Layer w1.2: D6.2@6.371,-44.511 cw(c7.227,-45.67) 7.599,-44.279 ; L1.1@8.936,-44.139 L1.1@9.576,-44.779 L1.1@9.576,-45.236 ; L1.1@9.251,-45.272 ccw(c6.223,-47.956) 6.223,-43.91 8.91,-43.91 cw(c8.861,-45.706) L1.1@10.145,-44.449
NetD7_1: D7.1 R38.1 | length 3.7
  Top Layer w0.75: R38.1@-9.566,-67.767 -7.798,-67.767 D7.1@-7.722,-67.691 ; R38.1@-9.371,-67.962 cw(c-8.902,-68.431) -8.902,-67.767 cw(c-8.902,-67.103) R38.1@-9.371,-67.573 ; -8.872,-67.767 ccw(c-8.872,-66.808) D7.1@-8.194,-67.486
NetD8_1: D8.1 R51.1
  other v1: -23.647,43.739
NetD8_2: D8.2 Q4.1
  other v1: -26.06,43.815
NetF2_2: F2.2 S3.1 S4.2 S4.3 | length 38.9
  Bottom Layer w2: S4.2@-12.515,-48.775 -12.312,-48.775 -7.849,-53.238 8.524,-53.238 S3.1@10.159,-51.604 ; F2.2@-8.761,-64.62 ccw(c-11.515,-61.865) -7.62,-61.865 ; F2.2@-7.62,-64.323 -7.62,-53.67
NetIR1_1: IR1.1 R31.2 | length 2.7
  Top Layer w0.6: v1(6.223,43.241) 6.233,43.231 IR1.1@7.645,43.231 ; v1@6.46,43.004 cw(c7.007,42.457) 7.007,43.231 ; v1@6.46,43.478 ccw(c7.056,44.074) 7.056,43.231
NetIR1_2: IR1.2 R29.2 VR1.1 | length 15.9
  Top Layer w0.6: 8.895,41.676 IR1.2@8.895,43.231
  Top Layer w0.8: R29.2@8.509,34.026 9.87,34.026 11.303,35.458 VR1.1@11.303,39.268 8.895,41.676 ; R29.2@8.989,34.279 ccw(c9.6,34.89) 9.6,34.026 ; VR1.1@10.903,39.268 ccw(c9.937,39.268) 10.62,39.951 ccw(c11.303,40.634) VR1.1@11.303,39.668 ; VR1.1@11.02,38.986 cw(c10.337,38.303) 11.303,38.303 cw(c12.269,38.303) VR1.1@11.586,38.986
NetIR2_2: IR2.2 R32.2 | length 4.4
  Top Layer w0.635: IR2.2@0.437,43.051 ccw(c2.834,43.051) R32.2@1.139,41.356 ; IR2.2@0.437,43.231 0.437,41.651 R32.2@1.067,41.021
NetJumper_BUZ1_1: Jumper_BUZ1.1 Q1.1 | length 16.7
  Top Layer w0.6: v1@-33.485,35.12 cw(c-34.057,34.548) -33.249,34.548 cw(c-32.44,34.548) v1@-33.012,35.12 ; v1(-33.249,35.357) -33.249,33.401 -26.035,26.187 Jumper_BUZ1.1@-24.511,26.187 ; -25.72,26.187 cw(c-25.72,24.928) Jumper_BUZ1.1@-24.829,25.818 ; -25.475,26.187 ccw(c-25.475,27.1) Jumper_BUZ1.1@-24.829,26.455
NetJumper_BUZ1_2: Jumper_BUZ1.2 LS1.1 | length 16.7
  Top Layer w0.635: LS1.1@-35.622,32.337 -34.369,32.337 Jumper_BUZ1.2@-25.908,23.876 ; LS1.1@-35.316,32.031 cw(c-34.578,31.293) -34.578,32.337 cw(c-34.578,33.381) LS1.1@-35.316,32.643 ; -26.889,24.857 ccw(c-25.92,25.826) Jumper_BUZ1.2@-25.92,24.456 ; -26.563,24.531 cw(c-27.07,24.023) Jumper_BUZ1.2@-26.352,24.023
  Bottom Layer w0.635: LS1.1@-35.794,32.233 -35.69,32.337 LS1.1@-35.622,32.337